# EAGLE board powerSwitch002 (EAGLE 7.2.0)
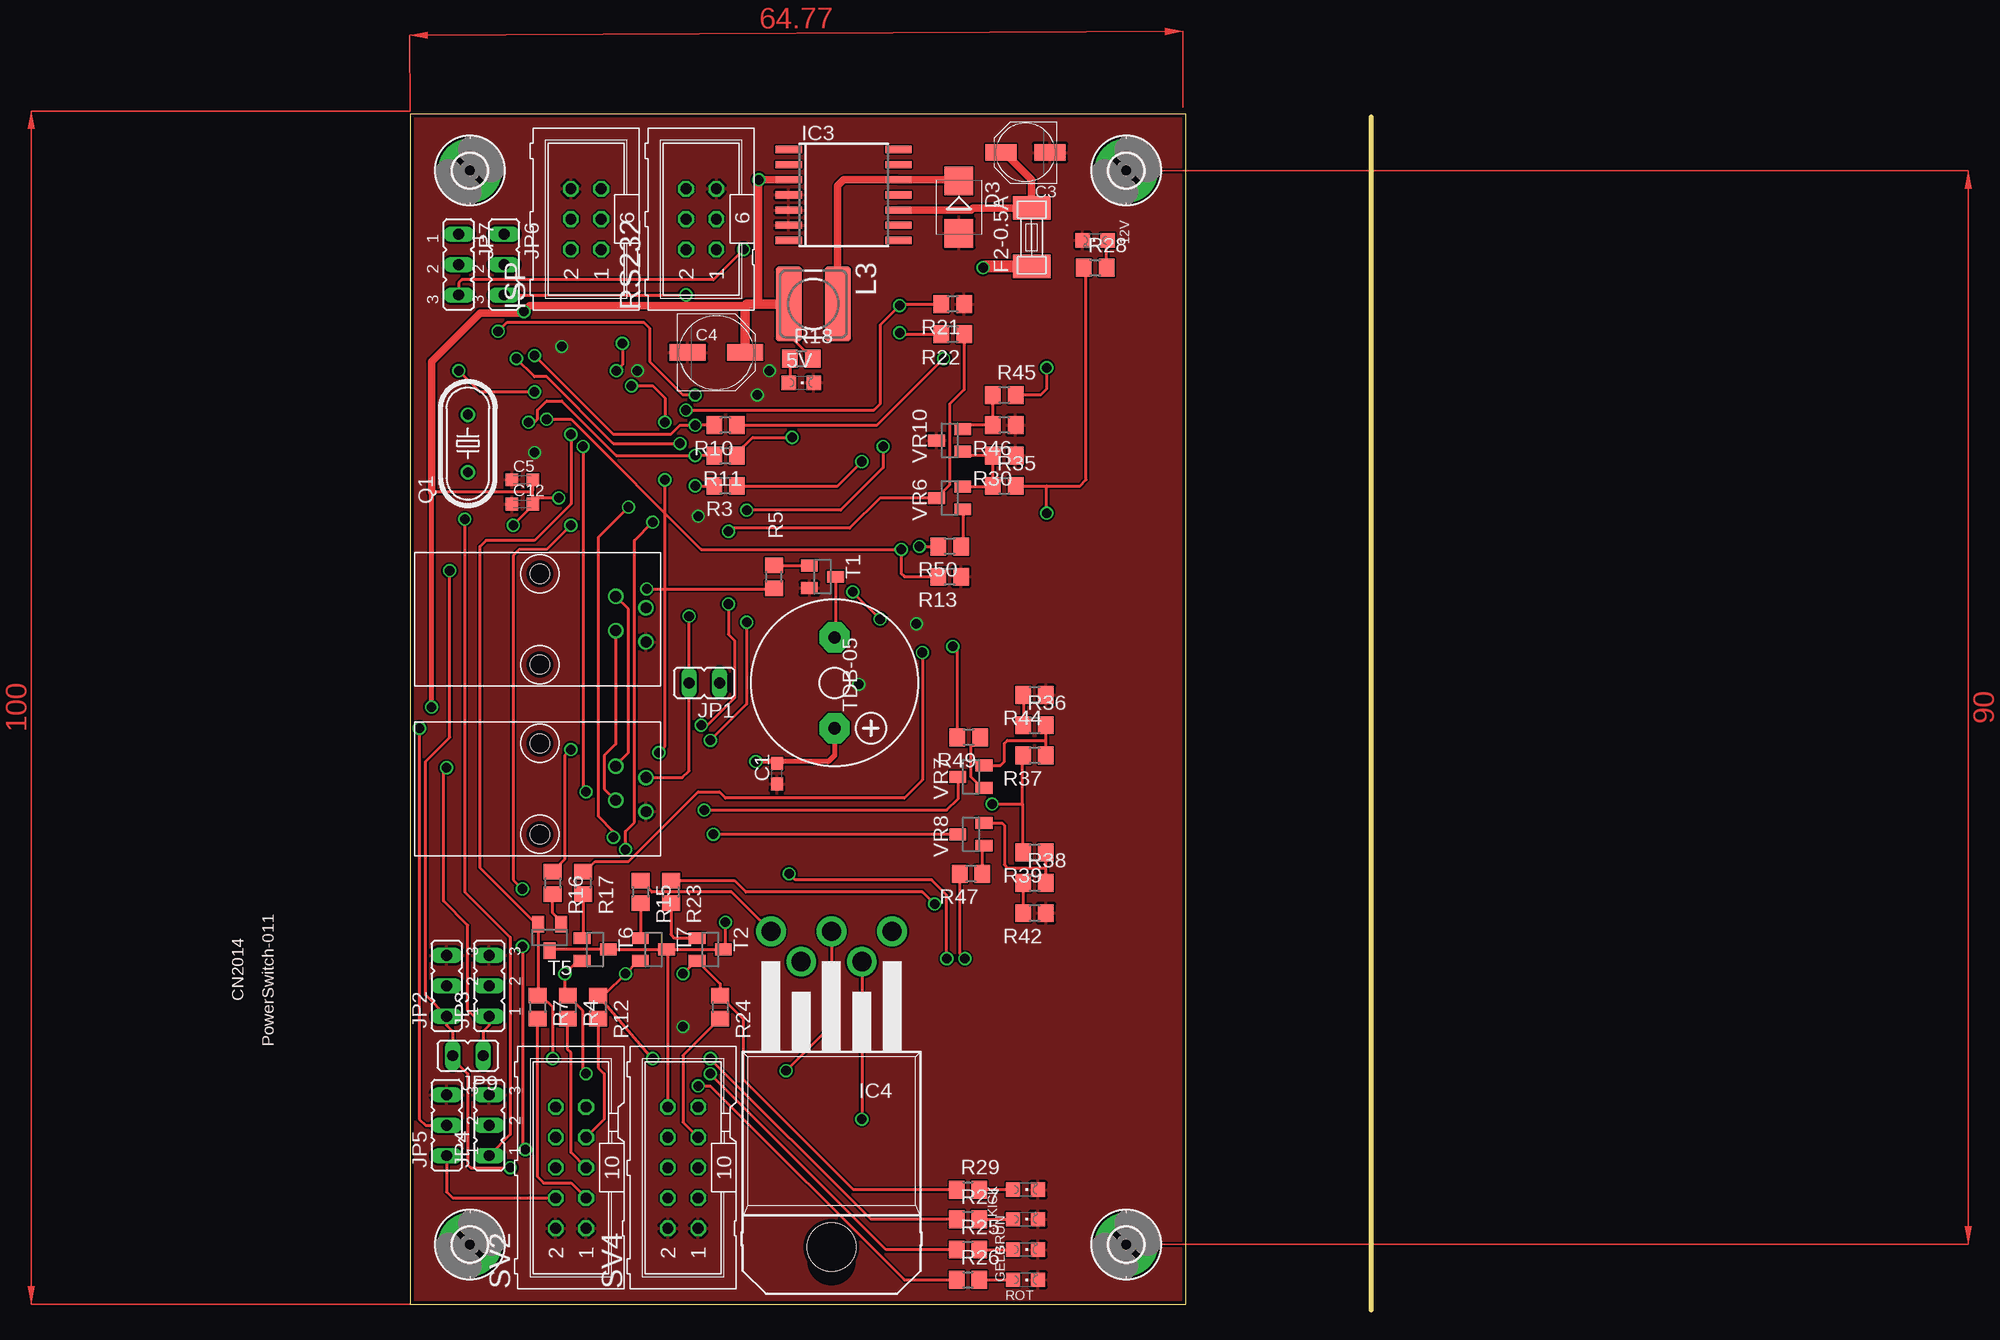
[diagram p0: board, top side]
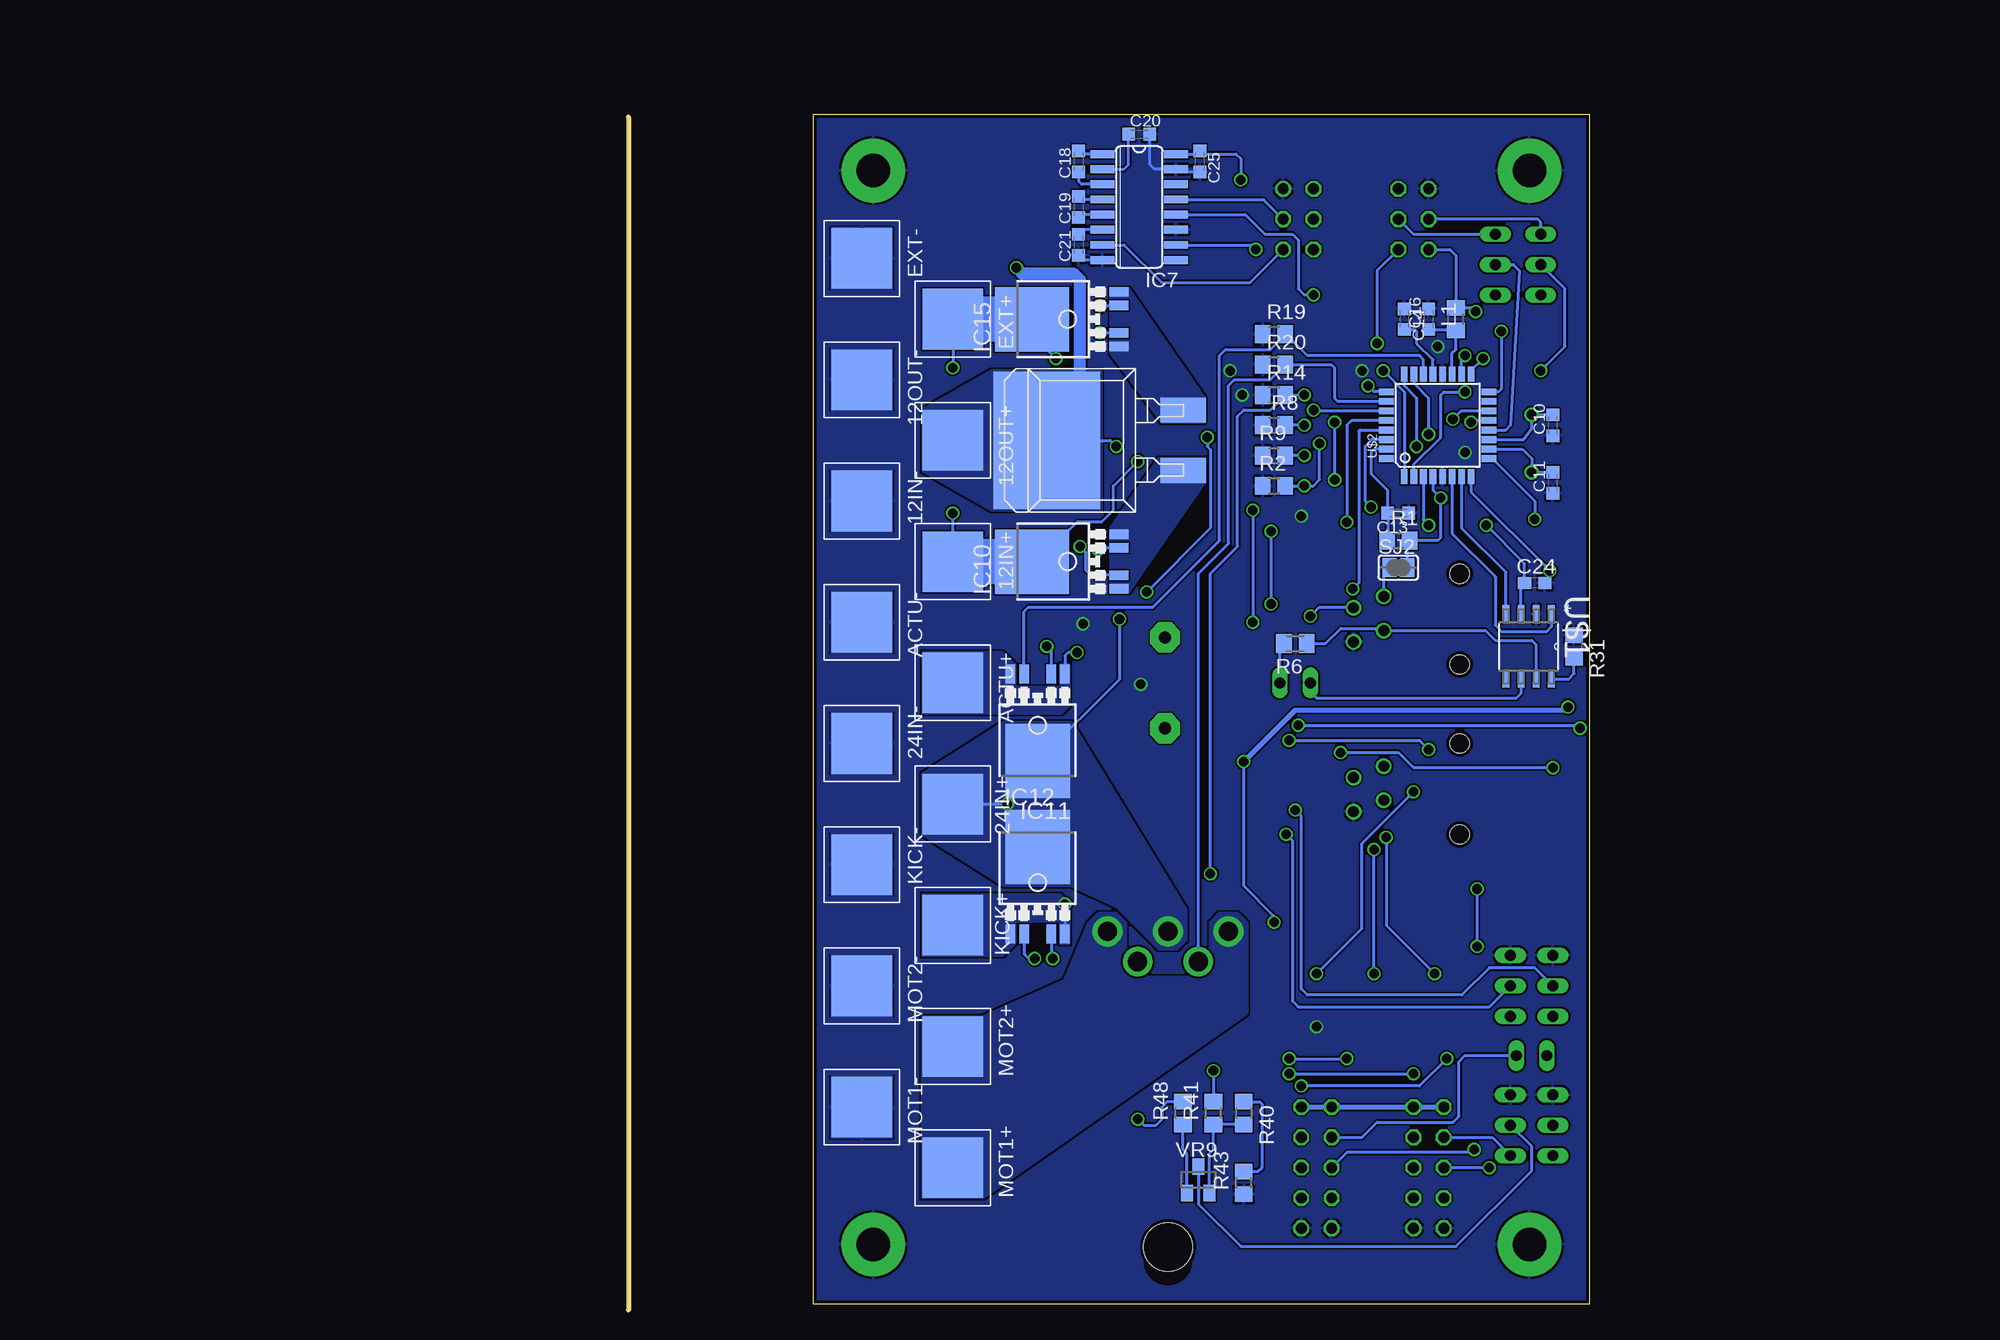
[diagram p1: board, bottom side, seen from below]

Size 80.51 x 100.25 mm. Coordinates in mm from the lower left corner, seen from the top.
Outline: 80.51,100 80.51,0
Outline: 0,0.51 65,0.51 65,100.25 0,100.25 0,0.51
Copper layers (1*16): Top 0.035mm / dielectric 1.5mm / Bottom 0.035mm
Design rules "PCB-POOL Standard *": minimum track width 0.15mm, minimum drill 0.3mm, track to track 0.15mm, track to pad 0.15mm, pad to pad 0.15mm, via to via 0.15mm, smd to smd 0.15mm, copper to edge 0.3mm, drill to drill 0.2mm, minimum pad ring 0.2mm, minimum via ring 0.15mm, stop-mask expansion 0.075mm, vias tented up to drill 0mil, thermal gap 0.2mm

## Footprints (pad centres in the part's own frame; a part is rotated, then mirrored left to right if it is on the bottom)
CHIPLED_0805 = smd 1.2 x 1.2: A 0,-1.05; C 0,1.05
5-5 = smd 5.08 x 5.08: P$1 0,0
C0603 = smd 1.1 x 1: 1 -0.85,0; 2 0.85,0
PANASONIC_C = smd 2.6 x 1.4: + 2.05,0; - -2.05,0
PANASONIC_D = smd 3 x 1.4: + 2.4,0; - -2.4,0
C0603K = smd 1.05 x 1.08: 1 -0.875,0; 2 0.875,0
D2PAK = smd 2.08 x 3.81: P$1 -2.54,-6.985; P$2 2.54,-6.985 | smd 11.5 x 8.89: P$3 0,4.445
SMB = smd 2.4 x 2.4: A 2.2,0; C -2.2,0
SMD-6,1X2,6 = smd 1.96 x 3.15: 1 -2.45,0; 2 2.45,0
2,8-PAD = drill 2.8 pad 5.334: B2,8 0,0
SO14W = smd 0.6 x 2.2: 1 -3.81,-4.6; 2 -2.54,-4.6; 3 -1.27,-4.6; 4 0,-4.6; 5 1.27,-4.6; 6 2.54,-4.6; 7 3.81,-4.6; 8 3.81,4.6; 9 2.54,4.6; 10 1.27,4.6; 11 0,4.6; 12 -1.27,4.6; 13 -2.54,4.6; 14 -3.81,4.6
TO220-52 = drill 1.6 pad 2.5: 1 -5.08,-30.48; 2 -2.54,-27.94; 3 0,-30.48; 4 2.54,-27.94; 5 5.08,-30.48 | hole 4.05: 0,-4
SO16 = smd 0.66 x 2.032: 1 -4.445,-3.073; 2 -3.175,-3.073; 3 -1.905,-3.073; 4 -0.635,-3.073; 5 0.635,-3.073; 6 1.905,-3.073; 7 3.175,-3.073; 8 4.445,-3.073; 9 4.445,3.073; 10 3.175,3.073; 11 1.905,3.073; 12 0.635,3.073; 13 -0.635,3.073; 14 -1.905,3.073; 15 -3.175,3.073; 16 -4.445,3.073
TO252-51 = smd 0.8 x 1.6: IN -1.14,-4.8; IS 1.14,-4.8; OUT1 -2.28,-4.8; OUT2 2.28,-4.8 | smd 5.4 x 6.2: TAB 0,2.5
ML6 = drill 0.914 octagon: 1 -2.54,-1.27; 2 -2.54,1.27; 3 0,-1.27; 4 0,1.27; 5 2.54,-1.27; 6 2.54,1.27
JP1 = drill 0.914 long: 1 0,-1.27; 2 0,1.27
JP2 = drill 0.914 long: 1 -2.54,0; 2 0,0; 3 2.54,0
R0805 = smd 1.3 x 1.5: 1 -0.95,0; 2 0.95,0
POWER-CHOKE_WE-TPC = smd 6.3 x 2.2: 1 0,2.05; 2 0,-2.05
HC49U-V@1 = drill 0.813: 1 -2.413,0; 2 2.413,0
M0805 = smd 1.3 x 1.6: 1 -0.95,0; 2 0.95,0
RJ10 = drill 0.9: P$1 -1.905,6.55; P$2 -0.953,9.09; P$3 0.953,6.55; P$4 1.905,9.09 | hole 1.59: -3.81,0.2; 3.81,0.2
SJ = smd 1.168 x 1.6: 1 -0.762,0; 2 0.762,0
ML10 = drill 0.914 octagon: 1 -5.08,-1.27; 2 -5.08,1.27; 3 -2.54,-1.27; 4 -2.54,1.27; 5 0,-1.27; 6 0,1.27; 7 2.54,-1.27; 8 2.54,1.27; 9 5.08,-1.27; 10 5.08,1.27
SOT23 = smd 1 x 1.4: 1 -0.95,-1.1; 2 0.95,-1.1; 3 0,1.1
F/CM12P = drill 1.016 pad 2.54 octagon: + 3.81,0; - -3.81,0
SOIC127P600X175-8N = smd 1.473 x 0.559: 1 -2.718,1.905; 2 -2.718,0.635; 3 -2.718,-0.635; 4 -2.718,-1.905; 5 2.718,-1.905; 6 2.718,-0.635; 7 2.718,0.635; 8 2.718,1.905
TQFP32-08 = smd 1.27 x 0.559: 1 -4.293,2.8; 2 -4.293,2; 3 -4.293,1.2; 4 -4.293,0.4; 5 -4.293,-0.4; 6 -4.293,-1.2; 7 -4.293,-2; 8 -4.293,-2.8; 17 4.293,-2.8; 18 4.293,-2; 19 4.293,-1.2; 20 4.293,-0.4; 21 4.293,0.4; 22 4.293,1.2; 23 4.293,2; 24 4.293,2.8 | smd 0.559 x 1.27: 9 -2.8,-4.293; 10 -2,-4.293; 11 -1.2,-4.293; 12 -0.4,-4.293; 13 0.4,-4.293; 14 1.2,-4.293; 15 2,-4.293; 16 2.8,-4.293; 25 2.8,4.293; 26 2,4.293; 27 1.2,4.293; 28 0.4,4.293; 29 -0.4,4.293; 30 -1.2,4.293; 31 -2,4.293; 32 -2.8,4.293

## Placement (x,y rotation side)
5V  [CHIPLED_0805]  32.77,77.72 270 top
12IN+  WIREPADSMD5-5  [5-5]  53.34,62.74 180 bottom
12IN-  WIREPADSMD5-5  [5-5]  60.96,67.82 180 bottom
12OUT+  WIREPADSMD5-5  [5-5]  53.34,72.9 270 bottom
12OUT-  WIREPADSMD5-5  [5-5]  60.96,77.98 180 bottom
12V  [CHIPLED_0805]  57.4,89.66 90 top
24IN+  WIREPADSMD5-5  [5-5]  53.34,42.42 90 bottom
24IN-  WIREPADSMD5-5  [5-5]  60.96,47.5 180 bottom
ACTU+  WIREPADSMD5-5  [5-5]  53.34,52.58 180 bottom
ACTU-  WIREPADSMD5-5  [5-5]  60.96,57.66 180 bottom
C1  100n  [C0603]  30.73,44.96 90 top
C3  VF 22/35 P-C  [PANASONIC_C]  51.56,97.03 180 top
C4  VF 220/16 K-D8  [PANASONIC_D]  25.65,80.26 0 top
C5  100n  [C0603K]  9.4,69.6 0 top
C10  22p  [C0603K]  3.05,74.17 90 bottom
C11  22p  [C0603K]  3.05,69.34 90 bottom
C12  100n  [C0603K]  9.4,67.56 0 top
C13  100n  [C0603K]  16,66.8 180 bottom
C14  100n  [C0603K]  15.49,83.06 270 bottom
C16  100n  [C0603K]  13.46,83.06 90 bottom
C18  100n  [C0603K]  42.8,96.27 90 bottom
C19  100n  [C0603K]  42.8,92.46 90 bottom
C20  100n  [C0603K]  37.72,98.55 0 bottom
C21  100n  [C0603K]  42.8,89.28 270 bottom
C24  100n  [C0603]  4.57,60.96 180 bottom
C25  100n  [C0603K]  32.64,96.27 270 bottom
D1  SFS1602G  [D2PAK]  41.02,72.9 90 bottom
D3  MBRS140  [SMB]  45.97,92.46 270 top
EXT+  WIREPADSMD5-5  [5-5]  53.34,83.06 270 bottom
EXT-  WIREPADSMD5-5  [5-5]  60.96,88.14 180 bottom
F2-0.5A  SMD-MICRO-FUSE  [SMD-6,1X2,6]  52.07,89.92 90 top
GELB  [CHIPLED_0805]  51.56,5.08 270 top
GRÜN  [CHIPLED_0805]  51.56,7.62 270 top
H5  MOUNT-PAD-ROUND2.8  [2,8-PAD]  5,95.51 0 top
H6  MOUNT-PAD-ROUND2.8  [2,8-PAD]  60,95.51 0 top
H7  MOUNT-PAD-ROUND2.8  [2,8-PAD]  5,5.51 0 top
H8  MOUNT-PAD-ROUND2.8  [2,8-PAD]  60,5.51 0 top
IC3  LM2574M-5.0  [SO14W]  36.32,93.47 270 top
IC4  BTS555E3146  [TO220-52]  35.31,1.27 180 top
IC7  MAX202  [SO16]  37.72,92.46 270 bottom
IC10  BTS6133  [TO252-51]  44.2,62.74 90 bottom
IC11  BTS6133  [TO252-51]  46.23,48.51 180 bottom
IC12  BTS6133  [TO252-51]  46.23,36.32 0 bottom
IC15  BTS6133  [TO252-51]  44.2,83.06 90 bottom
ISP  ISP  [ML6]  14.73,91.44 90 top
JP1  JP_CAN  [JP1]  24.64,52.58 90 top
JP2  [JP2]  3.05,27.18 90 top
JP3  [JP2]  6.6,27.18 90 top
JP4  [JP2]  6.6,15.49 90 top
JP5  [JP2]  3.05,15.49 90 top
JP6  [JP2]  7.87,87.63 270 top
JP7  [JP2]  4.06,87.63 270 top
JP9  [JP1]  4.83,21.34 90 top
KICK  [CHIPLED_0805]  51.56,10.1 270 top
KICK+  WIREPADSMD5-5  [5-5]  53.34,32.26 90 bottom
KICK-  WIREPADSMD5-5  [5-5]  60.96,37.34 180 bottom
L1  10µH  [R0805]  11.18,83.06 90 bottom
L3  WE-TPC 2811 10uH  [POWER-CHOKE_WE-TPC]  33.78,84.33 270 top
MOT1+  WIREPADSMD5-5  [5-5]  53.34,11.94 270 bottom
MOT1-  WIREPADSMD5-5  [5-5]  60.96,17.02 180 bottom
MOT2+  WIREPADSMD5-5  [5-5]  53.34,22.1 270 bottom
MOT2-  WIREPADSMD5-5  [5-5]  60.96,27.18 180 bottom
Q1  16Mhz  [HC49U-V@1]  4.83,72.64 90 top
R1  10k  [R0805]  16,64.52 0 bottom
R2  20k  [R0805]  26.42,69.09 0 bottom
R3  100k  [R0805]  26.42,69.09 180 top
R4  150  [R0805]  13.21,25.4 270 top
R5  4k7  [R0805]  30.48,61.47 90 top
R6  120  [M0805]  24.64,55.88 180 bottom
R7  150  [R0805]  10.67,25.4 270 top
R8  20k  [R0805]  26.42,74.17 0 bottom
R9  20k  [R0805]  26.42,71.63 0 bottom
R10  100k  [R0805]  26.42,74.17 180 top
R11  100k  [R0805]  26.42,71.63 0 top
R12  150  [R0805]  15.75,25.4 270 top
R13  1k  [R0805]  45.21,61.47 180 top
R14  1k  [R0805]  26.42,76.71 0 bottom
R15  10k  [R0805]  19.3,35.05 270 top
R16  10k  [R0805]  11.94,35.81 270 top
R17  10k  [R0805]  14.48,35.81 270 top
R18  150  [R0805]  32.77,79.76 0 top
R19  1k  [R0805]  26.42,81.79 0 bottom
R20  1k  [R0805]  26.42,79.25 0 bottom
R21  1k  [R0805]  45.47,84.33 180 top
R22  10k  [R0805]  45.47,81.79 180 top
R23  10k  [R0805]  21.84,35.05 270 top
R24  150  [R0805]  25.97,25.4 270 top
R25  150  [R0805]  46.74,5.08 0 top
R26  150  [R0805]  46.74,2.54 0 top
R27  150  [R0805]  46.74,7.62 0 top
R28  560  [R0805]  57.4,87.38 0 top
R29  150  [R0805]  46.74,10.1 0 top
R30  100k 0.1%  [R0805]  49.78,71.63 180 top
R31  1k  [R0805]  1.27,55.63 270 bottom
R35  220k 0.1%  [R0805]  49.78,69.09 0 top
R36  30k 0.1%  [R0805]  52.32,49.02 0 top
R37  300k 0.1%  [R0805]  52.32,46.48 180 top
R38  30k 0.1%  [R0805]  52.32,35.81 0 top
R39  300k 0.1%  [R0805]  52.32,38.35 180 top
R40  30k 0.1%  [R0805]  28.96,16.51 270 bottom
R41  300k 0.1%  [R0805]  31.5,16.51 90 bottom
R42  20k 0.1%  [R0805]  52.32,33.27 180 top
R43  20k 0.1%  [R0805]  28.96,10.67 90 bottom
R44  20k 0.1%  [R0805]  52.32,51.56 180 top
R45  910k 0.1%  [R0805]  49.78,76.71 0 top
R46  240k 0.1%  [R0805]  49.78,74.17 180 top
R47  10k  [R0805]  46.99,36.58 180 top
R48  10k  [R0805]  34.04,16.51 90 bottom
R49  10k  [R0805]  46.8,48.01 180 top
R50  10k  [R0805]  45.21,64.01 180 top
RJ_1  RJ10  [RJ10]  10.67,43.69 270 top
RJ_2  RJ10  [RJ10]  10.67,57.91 270 top
ROT  [CHIPLED_0805]  51.56,2.54 270 top
RS232  [ML6]  24.38,91.44 90 top
SJ2  [SJ]  16,62.23 180 bottom
SV2  SchalterBox  [ML10]  13.46,11.94 90 top
SV4  extraSchalter  [ML10]  22.86,11.94 90 top
T1  BC847  [SOT23]  34.54,61.47 270 top
T2  BC849  [SOT23]  25.15,30.23 270 top
T5  BC849  [SOT23]  11.68,31.24 180 top
T6  BC849  [SOT23]  15.49,30.23 270 top
T7  BC849  [SOT23]  20.38,30.23 270 top
TDB-05  F/CM12P  [F/CM12P]  35.56,52.58 270 top
U$1  MCP2551-I/SN  [SOIC127P600X175-8N]  5.08,55.63 270 bottom
U$2  ATMEGA64M1  [TQFP32-08]  12.7,74.17 90 bottom
VR6  TL431_SOT23  [SOT23]  45.21,68.07 90 top
VR7  TL431_SOT23  [SOT23]  46.99,44.7 90 top
VR8  TL431_SOT23  [SOT23]  46.99,39.88 90 top
VR9  TL431_SOT23  [SOT23]  32.77,10.92 0 bottom
VR10  TL431_SOT23  [SOT23]  45.21,72.9 90 top

## Library data of the parts
5V 12V GELB GRÜN KICK ROT = led
12IN+ 12IN- 12OUT+ 12OUT- 24IN+ 24IN- ACTU+ ACTU- EXT+ EXT- KICK+ KICK- MOT1+ MOT1- MOT2+ MOT2- = mywirepad
C1 C3-C5 C10-C14 C16 C18-C21 C24 C25 L3 R1-R31 R35-R50 = rcl
D1 RJ_1 RJ_2 = ownParts
D3 = diode
F2-0.5A = f-lf-omniblok-s
H5-H8 = holes
IC3 = linear
IC4 = infineon; OC_FARNELL: unknown; OC_NEWARK: unknown
IC7 = maxim; MPN: MAX3232CSE; OC_FARNELL: 9725490; OC_NEWARK: 90C2890
IC10-IC12 IC15 = BTS443P
ISP RS232 SV2 SV4 = con-ml; OC_FARNELL: unknown; OC_NEWARK: unknown
JP1-JP7 JP9 SJ2 = jumper
L1 = myrcl
Q1 = crystal
T1 T2 T5-T7 = transistor
TDB-05 = buzzer; OC_FARNELL: unknown; OC_NEWARK: unknown
U$1 = Microchip-MCP2551-I_SN; MPN: MCP2551-I/SN; OC_FARNELL: 9758569; OC_NEWARK: 69K7604; PACKAGE: SOIC-8; SUPPLIER: Microchip
U$2 = atmega16m1-32m1-64m1
VR6-VR10 = 1_USER

## Nets
12V: D1.P$1 IC10.OUT1 IC10.OUT2
12VIN: 12IN+.P$1 IC10.TAB R3.1 R28.1 R35.2
12VOUT: 12OUT+.P$1 D1.P$3 F2-0.5A.1 R16.1
24VIN: 24IN+.P$1 IC4.3 IC11.TAB IC12.TAB R11.2 R37.2 R39.2 R41.2
+5V: C1.2 C4.+ C5.2 C12.2 C24.2 C25.1 IC3.3 IC7.16 ISP.2 L1.2 L3.2 R1.2 R18.2 SJ2.1 SV2.9 SV2.10 SV4.9 SV4.10 T2.3 T5.3 T6.3 T7.3 TDB-05.+ U$1.3 U$2.4
ADC2: R9.2 R11.1 U$2.13
ADC3: IC10.IS R13.2 U$2.14
ADC5: IC12.IS R14.2 U$2.16
ADC6: IC4.4 R20.2 U$2.26
ADC7: IC15.IS R21.2 U$2.27
ADC8: R2.2 R3.2 U$2.17
ADC9: R8.2 R10.2 U$2.18
ADC10: IC11.IS R19.2 U$2.22
AKTUATOR: ACTU+.P$1 IC11.OUT1 IC11.OUT2 R17.1
CANH: R6.1 RJ_1.P$3 RJ_2.P$3 U$1.7
CANL: JP1.2 RJ_1.P$2 RJ_2.P$2 U$1.6
CS: U$2.32
EXT: D1.P$2 IC15.OUT1 IC15.OUT2
EXTIN: EXT+.P$1 IC15.TAB R10.1 R45.2
GND: 5V.C 12IN-.P$1 12OUT-.P$1 12V.C 24IN-.P$1 ACTU-.P$1 C1.1 C3.- C4.- C5.1 C10.1 C11.1 C12.1 C13.1 C14.1 C16.2 C20.2 C21.2 C24.1 C25.2 D3.A EXT-.P$1 GELB.C GRÜN.C H5.B2,8 H6.B2,8 H7.B2,8 H8.B2,8 IC3.4 IC3.5 IC3.6 IC7.8 IC7.11 IC7.15 ISP.6 JP2.3 JP3.3 JP4.3 JP5.3 KICK-.P$1 KICK.C MOT1-.P$1 MOT2-.P$1 R2.1 R8.1 R9.1 R13.1 R14.1 R19.1 R20.1 R21.1 R30.1 R31.1 R42.1 R43.1 R44.1 R46.1 RJ_1.P$4 RJ_2.P$4 ROT.C RS232.5 SV2.1 SV2.2 SV4.1 SV4.2 T1.2 U$1.2 U$2.5 U$2.20 VR10.3
ICLED_AKT: R4.1 R25.1 T6.2 U$2.30
ICLED_GRUEN: R12.1 R27.1 T7.2 U$2.28
ICLED_KICK: R24.1 R29.1 T2.2 U$2.24
ICLED_ROT: R7.1 R26.1 T5.2 U$2.23
KICKER: IC12.OUT1 IC12.OUT2 KICK+.P$1 R23.1
LED_1: SV4.5
LED_2: SV4.3
LED_GELB: R4.2 SV2.5
LED_GRUEN: R12.2 SV2.7
LED_KICK: R24.2 SV4.7
LED_ROT: R7.2 SV2.3
MISO: ISP.1 U$2.1
MOSI: ISP.4 JP7.1
MOTION: IC4.1 IC4.5 MOT1+.P$1 MOT2+.P$1 R15.1
N$1: R5.2 T1.1
N$2: RJ_1.P$1 RJ_2.P$1 SJ2.2
N$3: IC15.IN R22.2
N$4: R23.2 T2.1
N$5: KICK.A R29.2
N$6: R31.2 U$1.8
N$7: JP1.1 R6.2
N$8: GELB.A R25.2
N$9: R26.2 ROT.A
N$10: C10.2 Q1.2 U$2.11
N$11: C11.2 Q1.1 U$2.10
N$12: JP2.2 VR7.3
N$13: C14.2 U$2.21
N$14: C16.1 L1.1 U$2.19
N$15: C18.2 IC7.1
N$16: JP6.2 U$2.12
N$17: JP7.2 U$2.2
N$18: C19.2 IC7.4
N$19: JP4.2 VR9.3
N$20: T1.3 TDB-05.-
N$21: GRÜN.A R27.2
N$22: C3.+ F2-0.5A.2 IC3.10
N$23: JP3.2 VR8.3
N$24: 12V.A R28.2
N$25: JP5.2 R22.1 VR6.3
N$28: IC10.IN R50.2
N$33: R30.2 R35.1 VR6.2 VR10.1
N$35: C18.1 IC7.3
N$36: C19.1 IC7.5
N$37: C20.1 IC7.2
N$38: C21.1 IC7.6
N$39: R49.1 VR7.1
N$40: IC7.13 RS232.3
N$41: IC7.7 RS232.1
N$42: R36.2 R37.1 VR7.2
N$43: IC12.IN R47.2
N$44: R38.2 R39.1 VR8.2
N$45: R40.2 R41.1 VR9.2
N$46: IC4.2 R48.2
N$47: R38.1 R42.2
N$48: R40.1 R43.2
N$49: R36.1 R44.2
N$50: R45.1 R46.2 VR10.2
N$51: R47.1 VR8.1
N$52: R48.1 VR9.1
N$53: IC11.IN R49.2
N$54: R50.1 VR6.1
N$64: D3.C IC3.12 L3.1
N$102: R16.2 T5.1
N$104: R17.2 T6.1
N$106: R15.2 T7.1
N$108: 5V.A R18.1
RESET: ISP.5
RST: C13.2 R1.1 U$2.31
RXCAN: U$1.4 U$2.7
RXD: IC7.12 JP6.3
SCK: ISP.3 JP6.1
SPEAKER: R5.1 U$2.29
SW_1: SV4.6 U$2.3
SW_2: SV4.4
SW_12V: JP5.1 SV2.4
SW_AKT: JP2.1 JP9.2 SV2.6 U$2.8
SW_KICK: JP3.1 JP9.1 SV4.8 U$2.25
SW_MOT: JP4.1 SV2.8 U$2.9
TXCAN: U$1.1 U$2.6
TXD: IC7.10 JP7.3

## Tracks (layer width: path | path; a pad name or v marks a point on that pad's centre or on a via)
12V
  pour Bottom (rank 2, no thermals): 40.13,65.53 40.13,60.2 38.61,60.2 32.26,69.34 32.26,71.37 36.07,71.37
12VIN  (via drill 0.8)
  Top 0.254: R35.2 53.34,69.09 | 53.34,69.09 56.13,69.09 56.64,69.6 56.64,87.19 R28.1 | v53.34,66.8 53.34,69.09 | R3.1 35.81,69.09 v37.85,71.12
  Bottom 0.254: 12IN+.P$1 v53.34,66.8 | IC10.TAB 46.23,62.74 42.93,66.04 40.89,66.04 39.88,67.06 39.88,69.09 v37.85,71.12
  Bottom 3.81: 12IN+.P$1 IC10.TAB
12VOUT  (via drill 0.8)
  Top 0.254: v39.62,72.39 39.62,70.61 36.07,67.06 v28.19,67.06 | v28.19,57.66 28.19,50.8 v25.15,47.75 | v13.46,46.99 12.95,46.48 12.95,37.78 R16.1
  Top 1.016: F2-0.5A.1 48.1,87.47 v48.01,87.38
  Bottom 0.254: D1.P$3 40.13,72.9 v39.62,72.39 | v28.19,67.06 v28.19,57.66 | v25.15,47.75 14.22,47.75 v13.46,46.99
  Bottom 1.016: D1.P$3 45.47,75.44 42.67,78.23 42.67,86.36 43.18,86.87 47.5,86.87 v48.01,87.38
  pour Bottom (rank 2, no thermals): 55.88,70.36 50.04,67.06 40.89,67.06 40.89,78.74 50.04,78.74 55.88,75.44
24VIN  (via drill 0.8)
  Top 0.254: IC4.3 35.31,23.88 v31.5,20.07 | v48.77,42.42 51.31,42.42 | 51.31,42.42 51.31,38.42 R39.2 | 51.31,42.42 51.31,46.42 R37.2 | R11.2 27.37,71.82 28.7,73.15 v32,73.15 | v37.08,60.2 v39.37,57.91
  Bottom 0.254: v31.5,20.07 R41.2 | 24IN+.P$1 v48.77,42.42 | v32,73.15 32,72.39 31.75,72.14 31.75,65.53 v37.08,60.2 | v39.37,57.91 39.37,52.87 IC11.TAB
  pour Bottom (rank 2, no thermals): 55.88,44.96 49.02,49.28 43.43,49.28 33.78,33.53 33.78,30.99 34.54,30.23 36.07,30.23 39.62,33.78 43.43,35.56 49.02,35.56 55.88,39.88
+5V  (via drill 0.8)
  Top 0.254: T7.3 T6.3 11.77,30.23 T5.3 | T7.3 T2.3 26.42,30.23 v26.42,32.51 | SV4.10 21.59,29.72 21.48,29.82 T7.3 | L3.2 31.73,81.74 R18.2 | v12.45,68.07 10.27,68.07 | C12.2 10.27,68.07 | 10.27,68.07 C5.2 10.27,68.69 10.16,68.58 1.78,68.58 | C12.2 10.16,67.56 | C12.2 10.27,67.42 v8.64,65.79 | v9.53,83.69 8.76,83.69 8.64,83.57
  Top 0.406: TDB-05.+ 35.56,46.48 35.05,45.97 30.73,45.97 | 30.73,45.97 v28.96,45.97 | C1.2 30.73,45.97 | v1.78,50.55 1.78,68.58
  Top 0.61: 29.21,84.33 v29.21,94.74 IC3.3 | 28.05,84.19 10.02,84.19 v9.53,83.69 9.4,83.57 8.64,83.57 5.84,83.57 1.78,79.5 1.78,68.58
  Top 0.813: C4.+ 28.05,84.19 28.19,84.33 29.21,84.33 L3.2
  Bottom 0.254: IC7.16 32.88,96.9 | 32.88,96.9 C25.1 | ISP.2 11.68,88.9 11.18,88.39 L1.2 | 32.88,96.9 29.59,96.9 29.21,96.52 v29.21,94.74 | L1.2 11.11,84.01 | 5.45,60.98 C24.2 | U$1.3 5.71,60.67 C24.2 | U$2.4 13.1,68.73 v12.45,68.07 12.45,64.77 12.7,64.52 R1.2 15.24,64.33 SJ2.1 | C24.2 5.42,62.57 v8.64,65.79 | L1.2 9.84,84.01 v9.53,83.69 | v26.42,32.51 26.42,33.02 28.96,35.56 v28.96,45.97
  Bottom 0.406: SV2.10 SV2.9 SV4.10 SV4.9 | v28.96,45.97 24.64,50.29 2.03,50.29 v1.78,50.55
ADC2  (via drill 0.8)
  Top 0.254: R9.2 v23.88,71.63 17.27,71.63 12.7,76.2 11.43,76.2 10.67,75.44 10.67,74.68 10.41,74.42 v9.91,74.42
  Bottom 0.254: v23.88,71.63 R9.2 | U$2.13 9.76,74.57 v9.91,74.42
ADC3  (via drill 0.8)
  Top 0.254: R13.2 41.4,61.47 41.15,61.72 v41.15,63.75 24.38,63.75 13.46,74.68 v11.43,74.68
  Bottom 0.254: IC10.IS 41.02,63.88 v41.15,63.75 | U$2.14 10.74,75.37 v11.43,74.68
ADC5  (via drill 0.8)
  Top 0.254: v44.96,29.46 44.96,34.8 43.69,36.07 32.26,36.07 v31.75,36.58 | v7.37,82.04 8.13,82.8 19.56,82.8 20.07,82.3 20.07,79.5 22.86,76.71 v23.88,76.71
  Bottom 0.254: IC12.IS 45.09,29.59 v44.96,29.46 | v31.75,36.58 31.75,61.72 29.46,64.01 29.46,74.93 28.96,75.44 26.74,75.44 R14.2 v23.88,76.71 | v7.37,82.04 7.37,77.22 7.62,76.96 U$2.16
ADC6
  Bottom 0.254: IC4.4 32.77,61.72 30.23,64.26 30.23,77.47 29.72,77.98 26.74,77.98 R20.2 21.59,79.25 21.34,78.99 21.34,76.45 21.05,76.17 U$2.26
ADC7  (via drill 0.8)
  Top 0.254: R21.2 41.15,84.33 v41.02,84.2 39.37,82.55 39.37,75.95 38.86,75.44 v23.11,75.44
  Bottom 0.254: v41.02,84.2 IC15.IS | U$2.27 23.04,75.37 v23.11,75.44
ADC8  (via drill 0.8)
  Top 0.254: v23.88,69.09 R2.2 | v8.89,79.76 10.41,78.23 11.43,78.23 17.02,72.64 v22.61,72.64
  Bottom 0.254: R2.2 v23.88,69.09 23.11,69.09 22.61,69.6 v22.61,72.64 | U$2.17 9.9,78.75 v8.89,79.76
ADC9  (via drill 0.8)
  Top 0.254: R10.2 v23.88,74.17 22.61,74.17 21.84,73.41 17.02,73.41 v10.41,80.01
  Bottom 0.254: v23.88,74.17 R10.2 | U$2.18 10.7,79.72 v10.41,80.01
ADC10
  Bottom 0.254: IC11.IS 47.37,58.55 46.99,58.93 36.58,58.93 30.99,64.52 30.99,80.01 30.48,80.52 26.74,80.52 R19.2 25.4,81.79 23.62,80.01 14.22,80.01 13.9,79.69 U$2.22
AKTUATOR  (via drill 0.8)
  Top 0.254: R17.1 14.67,36.76 15.49,37.59 18.29,37.59 24.13,43.43 25.91,43.43 26.42,42.93 41.4,42.93 42.93,44.45 v42.93,55.12
  Bottom 0.254: v42.93,55.12 43.69,55.12 43.94,54.86 IC11.OUT1
  Bottom 0.813: 52.6,53.31 ACTU+.P$1
  pour Bottom (rank 2, no thermals): 43.56,50.67 43.56,54.1 44.32,54.1 44.32,52.2 48.13,52.2 48.13,54.1 49.15,55.12 55.88,55.12 55.88,50.04 44.2,50.04
CANH
  Top 0.254: RJ_2.P$3 17.22,47.44 16.26,46.48 16.26,43.7 RJ_1.P$3
  Bottom 0.254: U$1.7 4.45,55.75 4.83,56.13 7.87,56.13 8.7,56.96 RJ_2.P$3 17.41,57.15 20.83,57.15 22.1,55.88 R6.1
CANL  (via drill 0.8)
  Top 0.254: RJ_1.P$2 22.8,44.64 23.37,45.21 JP1.2 v23.37,58.17
  Bottom 0.254: JP1.2 23.37,51.82 22.86,51.31 6.1,51.31 5.71,51.69 U$1.6 | v23.37,58.17 22.61,58.93 19.82,58.93 RJ_2.P$2
EXT
  pour Bottom (rank 2, no thermals): 32.26,74.42 32.26,76.45 38.61,85.6 40.13,85.6 40.13,80.26 35.81,74.42
EXTIN  (via drill 0.8)
  Top 0.254: v53.34,78.99 53.34,77.22 52.83,76.71 R45.2 | R10.1 39.12,74.17 v44.7,79.76
  Bottom 0.254: EXT+.P$1 v53.34,78.99 | v44.7,79.76 46.48,81.53 46.48,82.84 IC15.TAB
  Bottom 3.81: EXT+.P$1 IC15.TAB
GND  (via drill 0.8)
  Bottom 0.254: IC7.8 42.4,88.01 C21.2 | C20.2 36.83,96.01 36.45,95.63 IC7.15 34.41,95.39 C25.2
  other vias: 12.7,80.77 10.41,71.88 24.13,66.55 19.05,78.74 30.1,78.74 29.08,76.71 37.59,52.45 42.42,57.53 22.86,23.75
  pour Bottom (rank 2, no thermals): 58.42,90.68 63.5,90.68 63.5,14.48 58.42,14.48
  pour Bottom (rank 6): 0,100.33 65.02,100.33 65.02,0.51 0,0.51
  pour Top (rank 6): 0,100.33 65.02,100.33 65.02,0.51 0,0.51
ICLED_AKT  (via drill 0.8)
  Top 0.254: R25.1 39.88,5.08 v25.15,19.81 | v14.73,19.81 14.48,20.07 14.48,25.08 R4.1 12.95,26.67 v12.95,28.19 14.04,29.28 T6.2 | v18.29,67.31 15.75,64.77 15.75,41.4 17.02,40.13 v17.02,39.62
  Bottom 0.254: v25.15,19.81 v14.73,19.81 | v12.95,28.19 17.02,32.26 v17.02,39.62 | U$2.30 18.22,72.97 18.8,72.39 18.8,67.82 v18.29,67.31
ICLED_GRUEN  (via drill 0.8)
  Top 0.254: R27.1 38.61,7.62 v25.15,21.08 | v20.32,21.08 20.25,21.08 R12.1 15.56,26.42 16.26,26.42 v18.03,28.19 19.03,29.19 | 19.28,29.19 19.03,29.19 | 19.03,29.19 19.12,29.28 T7.2 | v18.03,38.61 18.03,40.13 18.8,40.89 18.8,64.52 v20.32,66.04
  Bottom 0.254: v25.15,21.08 v20.32,21.08 | U$2.28 19.92,74.57 20.32,74.17 v20.32,66.04 | v18.03,28.19 v18.03,38.61
ICLED_KICK  (via drill 0.8)
  Top 0.254: R29.1 37.15,10.1 27.94,19.3 27.94,24.38 R24.1 25.97,27.35 T2.2 23.94,29.28 v22.86,28.19 | v14.48,72.39 14.48,43.69 v14.73,43.43
  Bottom 0.254: v22.86,28.19 19.05,32 19.05,39.12 v14.73,43.43 | U$2.24 15.5,77.48 14.48,76.45 v14.48,72.39
ICLED_ROT  (via drill 0.8)
  Top 0.254: v24.13,18.8 25.15,18.8 41.4,2.54 R26.1 | v11.94,21.08 11.94,25.4 10.99,26.35 R7.1 10.73,26.42 T5.2 10.58,32.34 5.84,37.08 5.84,64.01 6.35,64.52 10.41,64.52 13.46,67.56 v13.46,73.41
  Bottom 0.254: v11.94,21.08 14.22,18.8 v24.13,18.8 | U$2.23 14.7,77.69 13.46,76.45 v13.46,73.41
KICKER  (via drill 0.8)
  Top 0.254: v43.94,34.04 42.93,35.05 28.13,35.05 27.18,36 R23.1
  Bottom 0.254: v43.94,34.04 IC12.OUT2
  pour Bottom (rank 2, no thermals): 43.56,30.73 43.56,34.04 44.32,34.8 55.88,34.8 55.88,29.72 49.15,29.72 48.13,30.73 48.13,32.64 44.32,32.64 44.32,30.73
LED_GELB
  Top 0.254: SV2.5 13.46,13.21 13.46,21.59 13.21,21.84 R4.2
LED_GRUEN
  Top 0.254: R12.2 15.75,20.32 16.26,19.81 16.26,16 SV2.7
LED_KICK
  Top 0.254: R24.2 22.86,21.34 22.86,15.75 SV4.7
LED_ROT
  Top 0.254: SV2.3 13.46,10.67 11.18,10.67 10.67,11.18 R7.2
MISO  (via drill 0.8)
  Top 0.254: v17.78,81.03 17.78,79.25 v17.27,78.74
  Bottom 0.254: ISP.1 17.78,87.12 v17.78,81.03 | v17.27,78.74 15.49,76.96 U$2.1
MOSI
  Bottom 0.254: JP7.1 4.06,91.19 4.32,91.44 ISP.4
MOTION
  Top 0.254: IC4.5 26.92,35.05 20.25,35.05 R15.1
  pour Bottom (rank 3, no thermals): 55.88,9.4 55.88,24.64 50.8,24.64 43.94,27.69 41.91,32.51 41.15,33.27 39.62,33.27 38.86,32.51 38.86,28.45 38.35,27.94 32.26,27.94 31.75,28.45 31.75,32.51 30.99,33.27 29.46,33.27 28.7,32.51 28.7,24.89 50.8,9.4
N$1
  Top 0.254: R5.2 T1.1
N$2
  Top 0.254: RJ_1.P$1 17.22,45.67 18.29,46.74 18.29,58.75 RJ_2.P$1
  Bottom 0.254: RJ_2.P$1 17.22,61.78 SJ2.2
N$3  (via drill 0.8)
  Top 0.254: R22.2 41.15,81.79 v41.02,81.92
  Bottom 0.254: v41.02,81.92 IC15.IN
N$4
  Top 0.254: R23.2 21.84,31.5 22.16,31.18 T2.1
N$5
  Top 0.254: KICK.A R29.2
N$6
  Bottom 0.254: U$1.8 1.7,52.91 1.27,53.34 R31.2
N$7
  Bottom 0.254: JP1.1 25.91,55.56 R6.2
N$8
  Top 0.254: R25.2 GELB.A
N$9
  Top 0.254: R26.2 ROT.A
N$10
  Bottom 0.254: U$2.11 5.52,72.97 4.83,73.91 Q1.2 3.06,75.06 C10.2
N$11
  Bottom 0.254: U$2.10 5.62,72.17 4.83,71.37 Q1.1 4.81,70.22 C11.2
N$12  (via drill 0.8)
  Top 0.254: v24.64,41.91 44.96,41.91 45.89,42.84 VR7.3
  Bottom 0.254: v24.64,41.91 24.13,41.4 24.13,26.92 23.62,26.42 10.67,26.42 8.38,28.7 4.57,28.7 JP2.2
N$13
  Bottom 0.254: U$2.21 13.1,79.65 14.48,81.03 14.48,82.04 14.62,82.18 C14.2
N$14
  Bottom 0.254: U$2.19 11.5,80.19 11.18,80.52 L1.1 11.25,82.18 C16.1
N$15
  Bottom 0.254: IC7.1 42.56,96.9 C18.2
N$16
  Bottom 0.254: JP6.2 6.35,87.63 5.84,87.12 6.6,74.17 7,73.77 U$2.12
N$17  (via drill 0.8)
  Top 0.254: v10.41,76.96 5.84,76.96 v4.06,78.74
  Bottom 0.254: U$2.2 14.7,70.9 12.45,73.15 12.45,76.71 12.19,76.96 v10.41,76.96 | v4.06,78.74 2.03,80.77 2.03,85.6 JP7.2
N$18
  Bottom 0.254: IC7.4 42.56,93.09 C19.2
N$19
  Bottom 0.254: VR9.3 32.77,8.89 29.21,5.33 11.18,5.33 4.83,11.68 4.83,13.72 JP4.2
N$20
  Top 0.254: T1.3 35.64,56.47 TDB-05.-
N$21
  Top 0.254: R27.2 GRÜN.A
N$22
  Top 0.61: IC3.10 46.99,92.2 47.15,92.37 F2-0.5A.2 52.07,94.74 49.78,97.03 C3.+
N$23  (via drill 0.8)
  Top 0.254: VR8.3 v25.4,39.88
  Bottom 0.254: v25.4,39.88 24.89,39.37 24.89,25.91 24.38,25.4 8.38,25.4 JP3.2
N$24
  Top 0.254: R28.2 58.35,89.56 12V.A
N$25  (via drill 0.8)
  Top 0.254: R22.1 46.42,77.15 45.21,75.95 45.21,69.17 VR6.3 39.37,68.07 36.83,65.53 26.92,65.53 v26.67,65.28 | v0.76,48.77 0.76,16 1.27,15.49 JP5.2 | v26.67,59.18 26.67,56.64 27.18,56.13 27.18,51.31 24.89,49.02 v24.38,49.02
  Bottom 0.254: v26.67,65.28 v26.67,59.18 | v24.38,49.02 1.02,49.02 v0.76,48.77
N$28  (via drill 0.8)
  Top 0.254: v42.67,64.01 R50.2
  Bottom 0.254: IC10.IN 41.79,61.6 42.16,61.98 42.16,63.5 v42.67,64.01
N$33
  Top 0.254: VR6.2 48.77,69.02 R35.1 R30.2 46.89,71.63 VR10.1
N$35
  Bottom 0.254: C18.1 42.8,94.61 42.55,94.36 IC7.3
N$36
  Bottom 0.254: IC7.5 42.56,91.82 C19.1
N$37
  Bottom 0.254: IC7.2 38.99,95.63 38.61,96.01 38.61,98.54 C20.1
N$38
  Bottom 0.254: IC7.6 42.4,90.55 C21.1
N$39
  Top 0.254: VR7.1 47.94,43.75 46.99,44.7 46.99,47.25 R49.1
N$40
  Bottom 0.254: IC7.13 27.3,93.09 RS232.3
N$41
  Bottom 0.254: IC7.7 38.99,89.28 35.81,86.11 28.45,86.11 RS232.1
N$42
  Top 0.254: R37.1 53.27,47.75 | 53.27,47.75 R36.2 | VR7.2 49.46,45.65 49.78,45.97 49.78,47.5 50.04,47.75 53.27,47.75
N$43  (via drill 0.8)
  Top 0.254: R47.2 46.04,29.91 v46.48,29.46
  Bottom 0.254: IC12.IN 47.37,29.84 46.99,29.46 v46.48,29.46
N$44
  Top 0.254: R38.2 53.27,37.08 | 53.27,37.08 R39.1 | VR8.2 49.6,40.83 49.78,40.64 49.78,37.34 50.04,37.08 53.27,37.08
N$45
  Bottom 0.254: R40.2 R41.1 31.5,13.46 31.82,13.14 VR9.2
N$46  (via drill 0.8)
  Top 0.254: IC4.2 v37.85,16
  Bottom 0.254: v37.85,16 37.34,15.49 36.32,15.49 35.81,16 35.81,17.02 35.37,17.46 R48.2
N$47
  Top 0.254: R42.2 R38.1
N$48
  Bottom 0.254: R40.1 27.62,17.46 27.43,17.27 27.43,11.94 27.75,11.62 R43.2
N$49
  Top 0.254: R44.2 R36.1
N$50
  Top 0.254: VR10.2 46.63,74.17 R46.2 R45.1
N$51
  Top 0.254: R47.1 47.94,38.78 VR8.1
N$52
  Bottom 0.254: VR9.1 33.72,13.14 34.04,13.46 R48.1
N$53  (via drill 0.8)
  Top 0.254: R49.2 45.85,55.5 45.72,55.63 v45.47,55.63
  Bottom 0.254: IC11.IN 45.09,55.25 v45.47,55.63
N$54
  Top 0.254: VR6.1 46.31,64.16 R50.1
N$64
  Top 0.61: D3.C 45.89,94.74 IC3.12 36.32,94.74 35.81,94.23 35.81,84.35 L3.1
N$102
  Top 0.254: T5.1 12.63,32.58 11.94,33.27 R16.2
N$104
  Top 0.254: R17.2 14.48,31.26 T6.1
N$106
  Top 0.254: R15.2 19.3,31.2 T7.1
N$108
  Top 0.254: R18.1 31.82,77.82 5V.A
RST
  Bottom 0.254: U$2.31 18,72.17 18.29,71.88 18.29,70.1 16.88,68.69 C13.2 16.88,64.59 R1.1
RXCAN
  Bottom 0.254: U$2.7 10.7,65.56 6.99,61.85 U$1.4
RXD  (via drill 0.8)
  Top 0.254: JP6.3 v23.11,85.09
  Bottom 0.254: IC7.12 28.83,91.82 27.18,90.17 24.89,90.17 24.38,89.66 24.38,85.6 23.88,85.09 v23.11,85.09
SCK
  Bottom 0.254: ISP.3 14.73,90.17 JP6.1
SPEAKER  (via drill 0.8)
  Top 0.254: v19.81,60.45 30.41,60.45 R5.1
  Bottom 0.254: U$2.29 19.2,73.77 19.3,73.66 19.3,60.96 v19.81,60.45
SW_1  (via drill 0.8)
  Top 0.254: v9.4,35.31 8.64,36.07 8.64,63.25 9.14,63.75 11.43,63.75 v13.46,65.79 | v9.4,30.48 9.4,13.72 v9.65,13.46
  Bottom 0.254: U$2.3 13.9,66.22 v13.46,65.79 | v9.4,35.31 v9.4,30.48 | SV4.6 20.32,13.21 9.91,13.21 v9.65,13.46
SW_12V
  Top 0.254: JP5.1 3.05,9.91 3.56,9.4 SV2.4
SW_AKT  (via drill 0.8)
  Top 0.254: v8.38,11.94 5.08,11.94 4.83,12.19 4.83,19.81 3.56,21.08 JP9.2 3.56,23.37 3.05,23.88 JP2.1 1.27,26.42 1.27,45.97 3.3,48.01 v3.3,61.98
  Bottom 0.254: v8.38,11.94 SV2.6 | U$2.8 9.9,68.57 v3.3,61.98
SW_KICK  (via drill 0.8)
  Top 0.254: JP9.1 6.1,23.37 6.6,23.88 JP3.1 5.33,24.64 4.83,25.15 4.83,32.26 2.79,34.29 2.79,45.21 v3.05,45.47 | v18.54,77.47 20.32,77.47 21.34,76.45 v21.34,74.42 | v20.83,46.74 21.34,47.24 v21.34,69.6
  Bottom 0.254: SV4.8 19.05,14.48 17.78,15.75 11.43,15.75 10.92,16.26 10.92,20.83 10.41,21.34 JP9.1 | U$2.25 18.04,76.97 v18.54,77.47 | v21.34,74.42 v21.34,69.6 | v20.83,46.74 16,46.74 14.73,45.47 v3.05,45.47
SW_MOT  (via drill 0.8)
  Top 0.254: v4.57,66.29 4.57,35.05 8.38,31.24 8.38,14.73 JP4.1
  Bottom 0.254: SV2.8 8.13,14.48 JP4.1 | U$2.9 8.12,71.37 4.57,67.82 v4.57,66.29
TXCAN
  Bottom 0.254: U$2.6 11.5,65.09 7.87,61.47 7.87,57.4 7.37,56.9 3.56,56.9 3.17,57.28 U$1.1
TXD  (via drill 0.8)
  Top 0.254: v27.94,88.9 25.4,86.36 4.32,86.36 4.06,86.11 JP7.3
  Bottom 0.254: IC7.10 28.32,89.28 v27.94,88.9
(copper drawn outside any net)
  shapes: Top area x3

## Text on the board
tNames: CN2014 | PowerSwitch-011
Document: Speaker